# Altium PCB Relay Board.PcbDoc
Units mm, origin at the board's own origin, x right, y up, seen from the top; angles counter-clockwise.
Board outline 35 x 54 mm, 2 copper layers (Top Layer, Bottom Layer); 8 components, 9 nets, 28 pads, 0 vias.
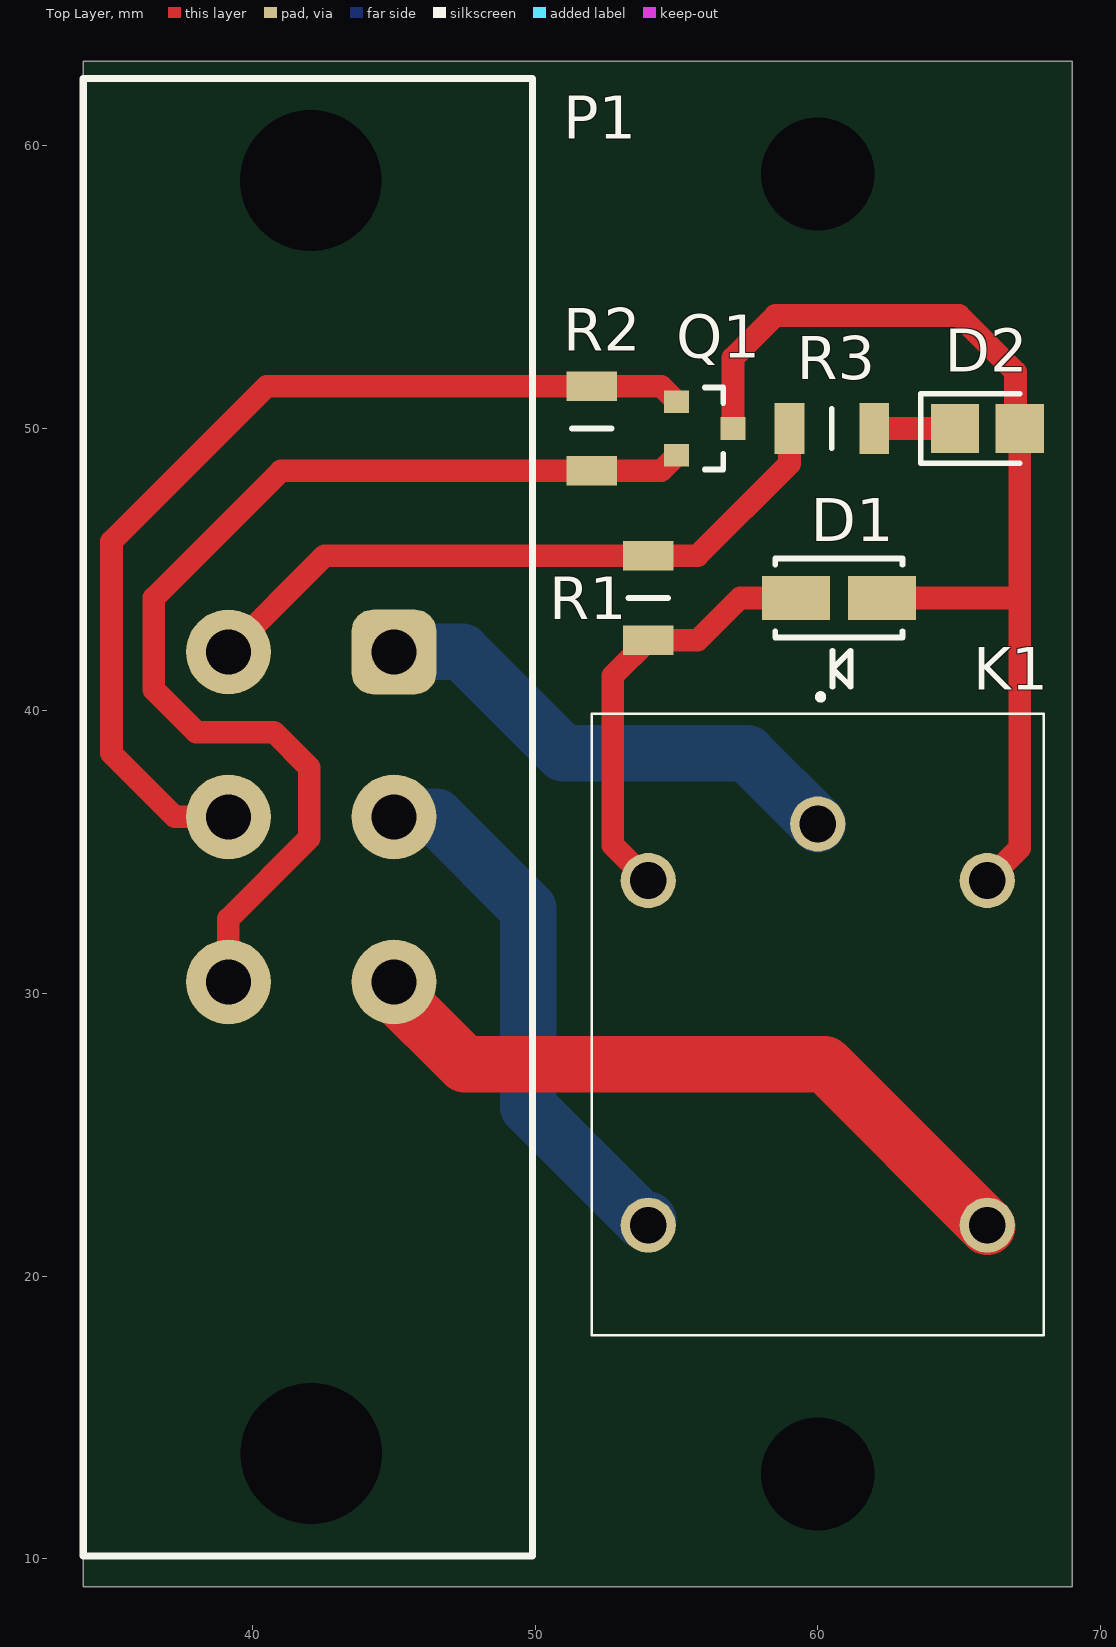
[diagram p0: Top Layer view]
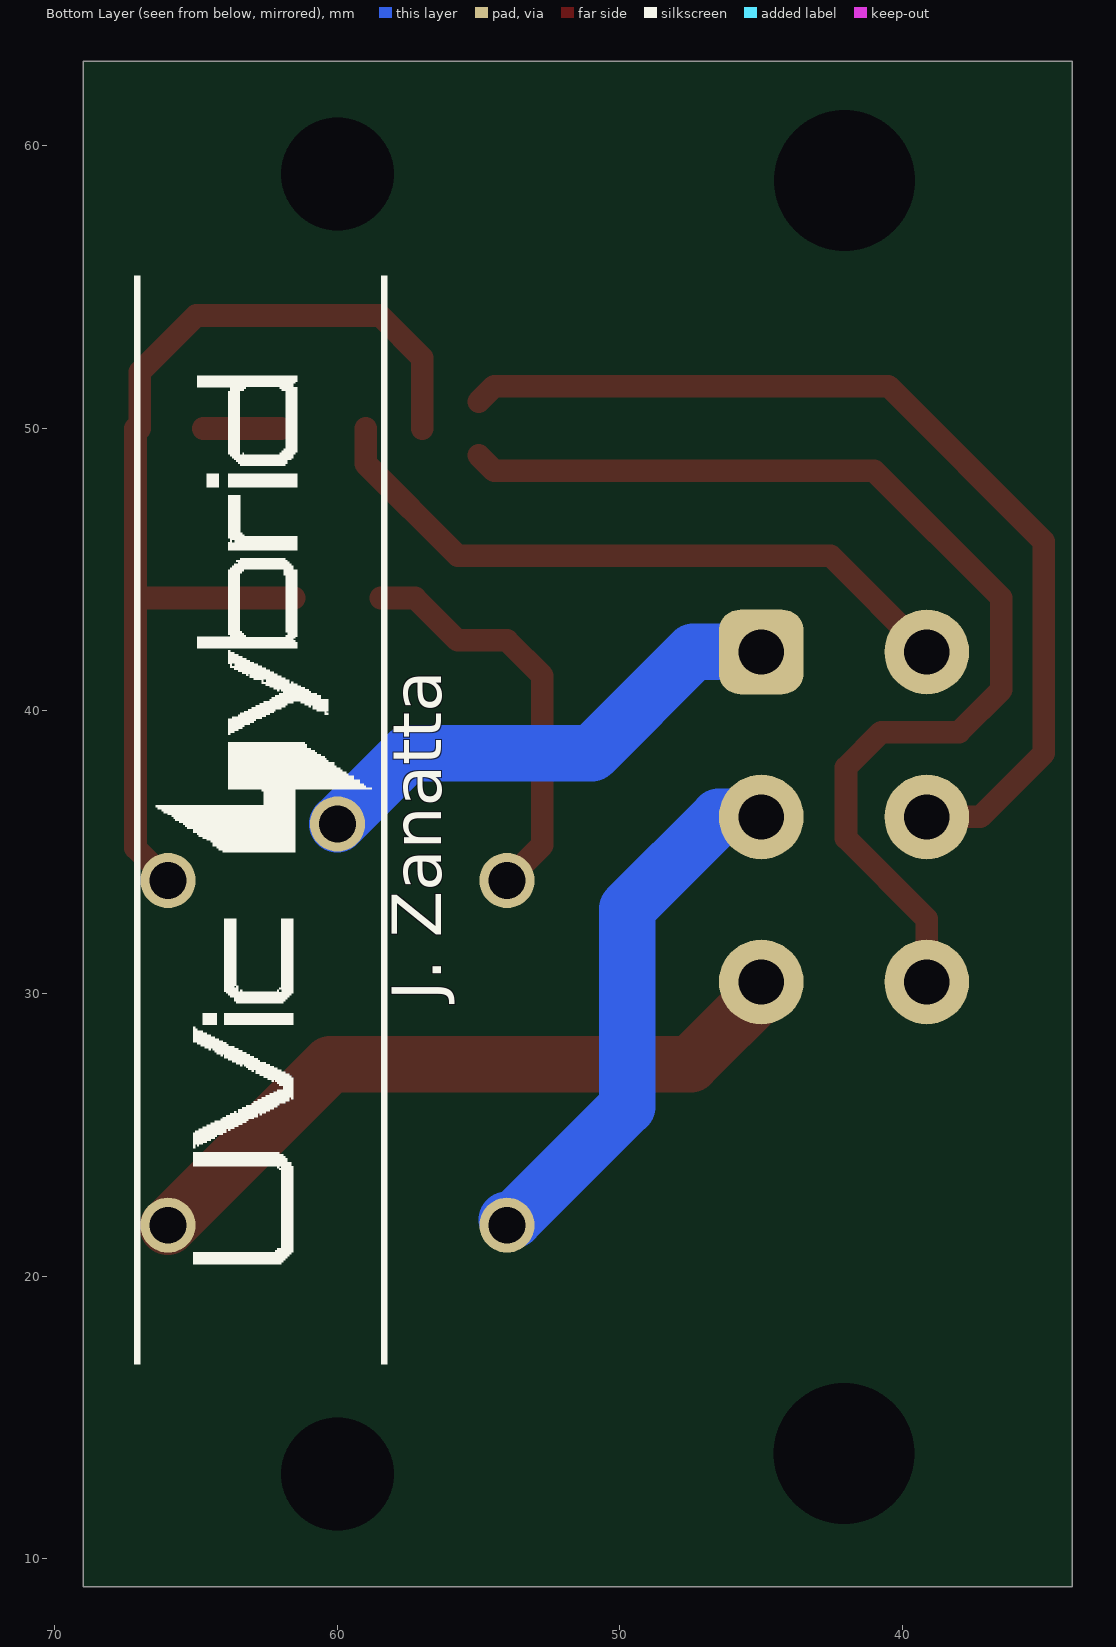
[diagram p1: Bottom Layer view, seen from below]
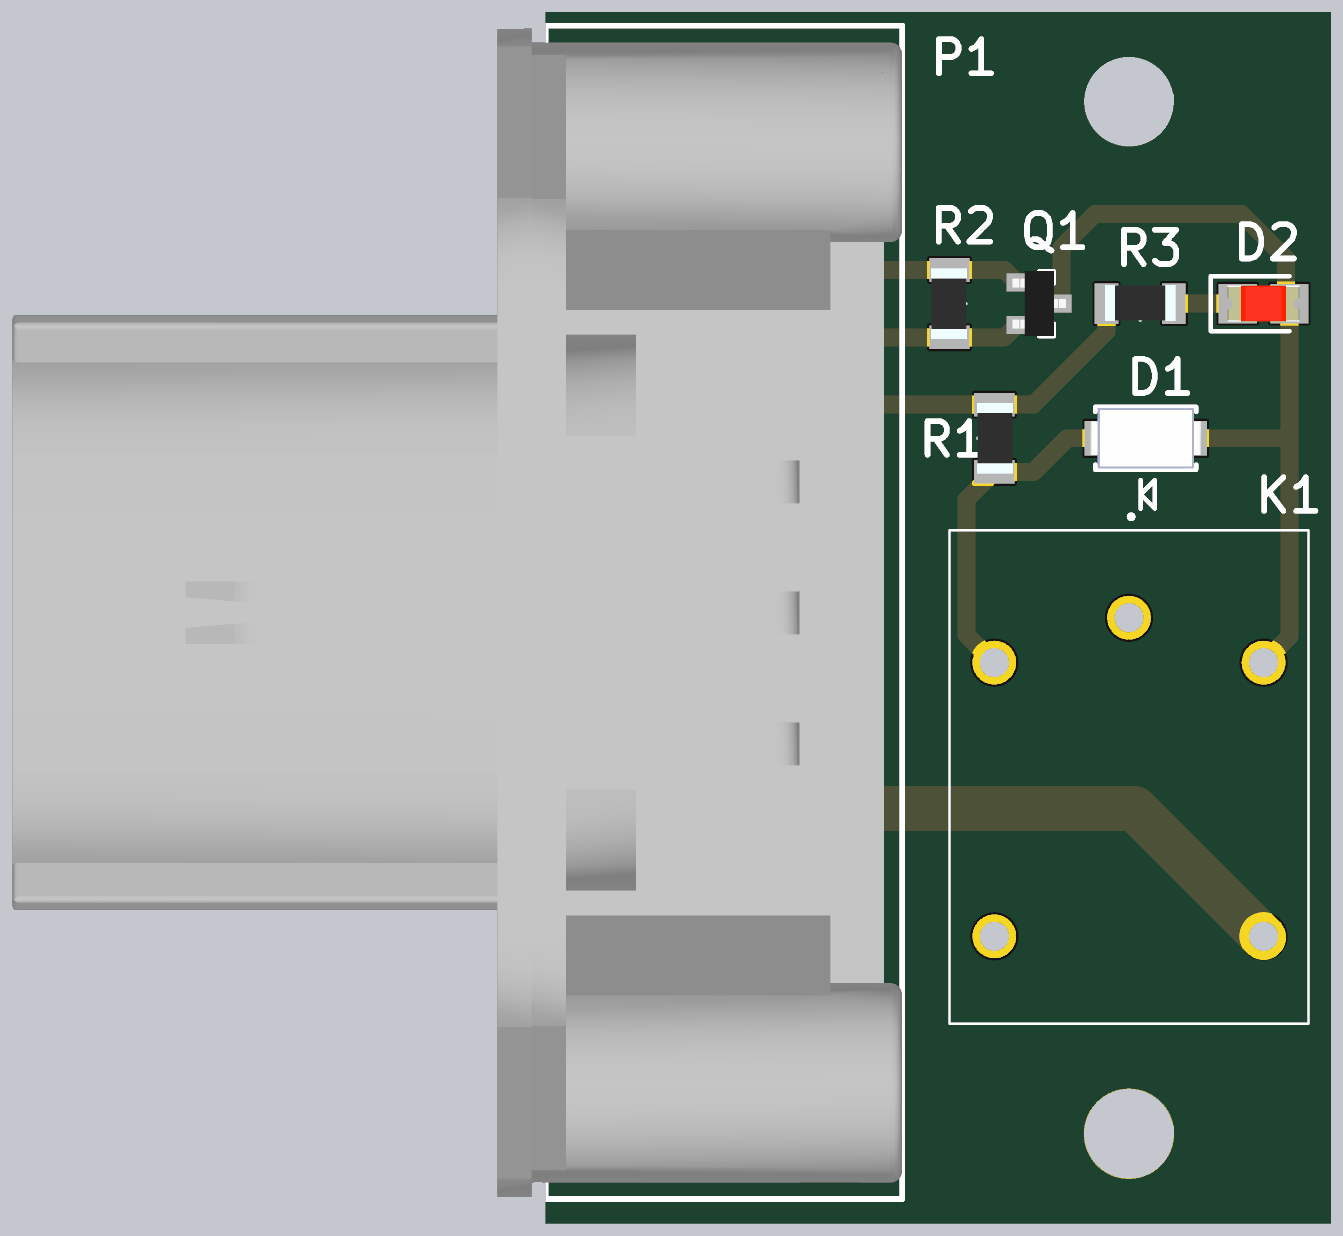
[diagram p2: 3D render of the assembled board from above, using the file's embedded part models]

## Layer stack, top to bottom
Top Solder: solder mask 0.0102, Solder Resist, Dk 3.5
Top Layer: signal copper 0.0356
Dielectric 1: dielectric 0.32, FR-4, Dk 4.8
Bottom Layer: signal copper 0.0356
Bottom Solder: solder mask 0.0102, Solder Resist, Dk 3.5

## Board outline
34,9 34,63 69,63 69,9

## Design rules (kind name [scope] priority, off if disabled: settings)
Clearance [All] p1: gap=0.254 ignorepadtopadclearanceinfootprint=FALSE except(0: Arc-Hole Track-Hole SMDPad-Hole THPad-Hole Via-Hole Fill-Hole Poly-Hole Region-Hole Text-Hole)
Height [All] p1: minheight=0.254 maxheight=50 prefheight=2
PolygonConnect [All] p1: connectstyle=Relief reliefconductorwidth=0.254 reliefentries=4 polygonreliefangle="90 Angle" airgapwidth=0.254
RoutingVias [All] p1: holewidth=0.711 width=1.27 viastyle="Through Hole" minholewidth=0.711 minwidth=1.27 maxholewidth=0.711 maxwidth=1.27
SolderMaskExpansion [All] p1: expansion=0.102
Width [All] p1: maxlimit=2 minlimit=0.4 preferedwidth=0.8
29 further rules are at their usual default settings.

## Components (designator, comment, footprint, x,y, rotation, side; value= is the part's Value field where it differs from the comment)
D1 "S1G-E3/61T" VISH-DO-214AC-SMA-2_N 60.75,44 r180 top
D2 "Red" LEDC3216X120NRED 66,50 r0 top
K1 "JSM1-12V-4" JSM112V4 60,34 r270 top
P1 "19427-0018" "MX150L 6pin" 49.9,10.09 r90 top
Q1 "Trans_Diodes_2N7002-7-F_eec" Diodes_2N7002-7-F_0 56,50 r0 top
R1 "120" RESC3216X60N 54,44 r90 top value=10K
R2 "10K" RESC3216X60N 52,50 r270 top
R3 "1k" RESC3216X60N 60.5,50 r180 top value=10K

## Footprints (in the part's own frame and the unit in brackets; to place one, negate y for a bottom-side part, rotate by r counter-clockwise, add the part's x,y. Pads: shape width x height; smd on the part's side, far side on the other; paste and mask are expansions set on the pad)
Diodes_2N7002-7-F_0 [mm]
  rect 0.9x0.8 smd paste+0 mask+0: 1(-1,0.95) 2(-1,-0.95) 3(1,0)
  silkscreen extent 0,-1.45 0.65,1.45, body extent -1.2,-1.45 1.2,1.45, height 1.1
JSM112V4 [mm]
  round 1.95 hole 1.3: 1(-2,0) 2(0,-6) 3(12.2,-6) 4(12.2,6) 5(0,6)
  silkscreen extent -6.6,-8 16.1,8
LEDC3216X120NRED [mm]
  rect 1.7x1.75 smd: 1(-1.15,0) 2(1.15,0)
  silkscreen extent -2.35,-1.22 1.15,1.22, body extent -1.6,-0.8 1.6,0.8, height 1.1
"MX150L 6pin" [mm] "19427-0018 MX150L 6pin"
  round 0 hole 5 unplated: 0(3.63,7.83) 0(48.69,7.85)
  rrect50% 3x3 hole 1.6: 1(32,4.9)
  round 3 hole 1.6: 2(26.16,4.9) 3(20.32,4.9) 4(32,10.76) 5(26.16,10.76) 6(20.32,10.76)
  silkscreen extent 0,0 52.3,15.9, body extent 0.1,0.01 52.18,39.66, height 33.7
RESC3216X60N [mm]
  rect 1.05x1.8 smd: 1(-1.5,0) 2(1.5,0)
  silkscreen extent 0,-0.7 0,0.7, body extent -1.57,-0.83 1.58,0.77, height 1.2
VISH-DO-214AC-SMA-2_N [mm] "Molded Diode, 2-Leads, Body 4.5x2.79mm, IPC Medium Density"
  rect 2.4x1.55 smd: 1(-1.525,0) 2(1.525,0)
  silkscreen extent -2.25,-1.4 2.25,3.14, body extent -2.5,-1.35 2.5,1.35, height 2.2

## Part data
D1: "Surface Mount Glass Passivated Rectifier, 400 VDC, 1 A, -55 to 150 degC, 2-Pin SMD, RoHS, Tape and Reel", Manufacturer="Vishay Semiconductor", Max Operating Temperature="150 degC", Min Operating Temperature="-55 degC", Package Quantity=1800, ComponentLink1Description="Manufacturer URL", ComponentLink1URL=http://www.vishay.com/, ComponentLink2Description=Datasheet, ComponentLink2URL=http://www.vishay.com/docs/88711/s1.pdf, DatasheetVersion=02/2016, Height="2.29 mm", Length="4.5 mm", Mount="Surface Mount", Mounting Technology="Surface Mount", PackageDescription="2-Pin Surface Mount Device, Body 4.245 x 2.665 mm", PackageReference=DO-214AC-2, Packaging="Tape and Reel", PartNumber=S1G-E3/61T, Pins=2, REACH SVHC=Unknown, RoHSCompliant=true
D2: library part LED2_2, "Typical RED, GREEN, YELLOW, AMBER GaAs LED", Case/Package=1206, Case Code (Metric)=3216, Colour=Yellow, Forward Current=20mA, Forward Voltage=2.1V, Lens Colour=White,Clear, Manufacturer="Broadcom Avago", Manufacturer Part Number=HSMY-C150, Max Operating Temperature=85°C, Max Power Dissipation=65mW, Min Operating Temperature=-40°C, Package Quantity=1, Reverse Voltage=5V, Supplier Part Number=732-4992-1-ND, Case Code (Imperial)=1206, ComponentLink1Description=https://datasheet.ciiva.com/15117/getdatasheetpartid-110528-15117488.pdf, ComponentLink1URL=https://datasheet.ciiva.com/15117/getdatasheetpartid-110528-15117488.pdf, ComponentLink2Description=https://datasheet.ciiva.com/11774/0900766b804a6539-11774578.pdf, ComponentLink2URL=https://datasheet.ciiva.com/11774/0900766b804a6539-11774578.pdf, ComponentLink3Description=https://datasheet.ciiva.com/19466/1557071-19466435.pdf, ComponentLink3URL=https://datasheet.ciiva.com/19466/1557071-19466435.pdf, ComponentLink4Description=https://datasheet.ciiva.com/14172/swseriehsmx-c150toc190-e-14172159.pdf, ComponentLink4URL=https://datasheet.ciiva.com/14172/swseriehsmx-c150toc190-e-14172159.pdf, ComponentLink5Description=https://datasheet.ciiva.com/29280/180507-da-01-en-chip-led-hsmy-c150-gelb-29280997.pdf, ComponentLink5URL=https://datasheet.ciiva.com/29280/180507-da-01-en-chip-led-hsmy-c150-gelb-29280997.pdf, ComponentLink6Description=https://datasheet.ciiva.com/11773/0900766b804a6539-11773956.pdf, ComponentLink6URL=https://datasheet.ciiva.com/11773/0900766b804a6539-11773956.pdf, ComponentLink7Description=https://datasheet.ciiva.com/15117/getdatasheetpartid-142358-15117749.pdf, ComponentLink7URL=https://datasheet.ciiva.com/15117/getdatasheetpartid-142358-15117749.pdf, ComponentLink8Description=https://datasheet.ciiva.com/46426/313031-46426533.pdf, ComponentLink8URL=https://datasheet.ciiva.com/46426/313031-46426533.pdf, ComponentLink9Description=https://datasheet.ciiva.com/14172/swseriehsmx-c150toc190-e-14172156.pdf, ComponentLink9URL=https://datasheet.ciiva.com/14172/swseriehsmx-c150toc190-e-14172156.pdf, ComponentLink10Description=https://datasheet.ciiva.com/29281/180509-da-01-en-chip-led-hsmh-c150-rot-29281009.pdf, ComponentLink10URL=https://datasheet.ciiva.com/29281/180509-da-01-en-chip-led-hsmh-c150-rot-29281009.pdf, Contact Plating=Gold, Depth=1.6mm, Dominant Wavelength=586nm, Height=1.1mm, Illumination Colour=Yellow, LatestRevisionDate=17-Jul-2002, LatestRevisionNote="Re-released for DXP Platform.", Lead Free="Lead Free", Length=3.2mm, Lens Style=Diffused,Colorless,Rectangular, Lens Transparency=Diffused, Luminous Intensity=8mcd, Mount="Surface Mount", Number of Elements=1, Number of LEDs=1, Number of Pins=2, PackageDescription="SM LED; 2 Flat Leads", PackageReference=3.2X1.6X1.1, PackageVersion=Feb-2002, Packaging="Tape and Reel", Power Dissipation=65mW, Power Rating=65mW, Published=8-Jun-2000, Publisher="Altium Limited", Radiation Hardening=No, REACH SVHC="No SVHC", Stock 1=0, Stock 2=0, Supplier 1=Digi-Key, Supplier 2=Digi-Key, Supplier 3=Digi-Key, Supplier 4=Digi-Key, Test Current=20mA, Viewing Angle=170°, Voltage Rating (DC)=2.1V, Wavelength=586nm, Width=1.6mm
K1: "PANASONIC ELECTRIC WORKS - JSM1-12V-4 - RELAY, AUTOMOTIVE, SPDT, 16VDC, 10A", Manufacturer_Name=Panasonic, Allied_Number=70618207, Allied Price/Stock=https://www.alliedelec.com/panasonic-jsm1-12v-4/70618207/, Arrow Part Number=JSM1-12V-4, Arrow Price/Stock=https://www.arrow.com/en/products/jsm1-12v-4/panasonic, Datasheet Link=https://media.digikey.com/pdf/Data%20Sheets/Panasonic%20Electric%20Works%20PDFs/JS-M_Series_Rev_Dec_2011.pdf, Manufacturer_Part_Number=JSM1-12V-4
P1: library part "19427-0018 MX150L 6pin", "MX150L 6pin", Manufacturer_Name=Molex, Supplier Part Number 1=WM17506-ND, Manufacturer_Part_Number=19427-0018
Q1: "TRANS MOSFET N-CH 60V 115MA SOT23-3", breakdown_voltage_drain_to_source="70 V", current_rating="115 mA", Digikey Part Number=2N7002-FDICT-ND, Manufacturer=Diodes, max_breakdown_voltage_gate_to_source="20 V", min_breakdown_voltage_gate_to_source="-20 V", Mouser Part Number=621-2N7002-F, Octopart Part Number=e39a2a95da213c5d, Package=SOT-23, Part Number=2N7002-7-F, power_dissipation="300 mW", rds_drain_to_source_resistance_on="4.4 O", Temperature="-55°C to +150°C", Temperature Range High=+150°C, Temperature Range Low=-55°C, vds_drain_to_source_voltage="60 V", Category 2F8Ae2801E7Ef44D=Uncategorized, Category 3B27F62D0A3Ae0E0="Discretes (diodes, transistors, thyristors ...)", Category 6F04A20E5Eeab4C3=Uncategorized, Category 9E07530Daf1645C0="Semiconductors and Actives", Category 931F5E15A77D48D8=Uncategorized, Category Aa6D67679B8D71Aa="N Channel MOSFET", Category D77D1A77E69F0Cba=Transistors, Category E7B12Abbd6523C76=MOSFETs, ComponentLink1Description=Upverter, ComponentLink1URL=https://upverter.com/upn/revision/25d808f54d4a1cce/, ComponentLink2Description=Datasheet, ComponentLink2URL=https://upverter.com/datasheet/64901800f65d029d74a1b11cf5c344e3d7ff58ae.pdf, Digikey Description="TRANS MOSFET N-CH 60V 115MA SOT23-3", helpURL=https://upverter.com/upn/revision/25d808f54d4a1cce/, id_continuous_drain_current="115 mA", Ipc Land Pattern Name=SOT92P240X120-3, Lead Free=yes, Mounting Type="surface mount", Num Pins=3, polarity=N-Channel, Price=0.0714567392161, RoHS=TRUE, Supplier 1=Digi-Key, Supplier 2=Mouser, Supplier Part Number 1=2N7002-FDICT-ND, Supplier Part Number 2=621-2N7002-F, voltage_rating_dc="60 V"
R1 R2: library part Res1, "Resistor", Case/Package=1206, Case Code (Metric)=3216, Manufacturer="Stackpole Electronics", Manufacturer Part Number=RNCP1206FTD1K00, Max Operating Temperature=155°C, Max Power Dissipation=500mW, Min Operating Temperature=-55°C, Resistance=120R, Supplier Part Number=RNCP1206FTD10K0CT-ND, Temperature Coefficient=100ppm/°C, Tolerance=1%, Case Code (Imperial)=1206, ComponentLink1Description=http://www.seielect.com/Catalog/SEI-rncp.pdf, ComponentLink1URL=http://www.seielect.com/Catalog/SEI-rncp.pdf, ComponentLink2Description=https://www.seielect.com/catalog/SEI-Packaging.pdf, ComponentLink2URL=https://www.seielect.com/catalog/SEI-Packaging.pdf, Composition="Thin Film", Contact Plating=Nickel,Tin,Matte, Height=0.024inch, Lead Free="Lead Free", Length=0.122inch, Mount="Surface Mount", Number of Terminations=2, Packaging="Tape and Reel", Pricing 1="1=0.1, 10=0.052, 100=0.0211, 1000=0.00949, 2500=0.00824 (USD)", Radiation Hardening=No, Stock 1=679, Supplier 1=Digi-Key, Width=0.059inch
R3: library part Res1, "Resistor", Case/Package=1206, Case Code (Metric)=3216, Manufacturer="Stackpole Electronics", Manufacturer Part Number=RNCP1206FTD1K00, Max Operating Temperature=155°C, Max Power Dissipation=500mW, Min Operating Temperature=-55°C, Resistance=10kR, Supplier Part Number=RNCP1206FTD10K0CT-ND, Temperature Coefficient=100ppm/°C, Tolerance=1%, Case Code (Imperial)=1206, ComponentLink1Description=http://www.seielect.com/Catalog/SEI-rncp.pdf, ComponentLink1URL=http://www.seielect.com/Catalog/SEI-rncp.pdf, ComponentLink2Description=https://www.seielect.com/catalog/SEI-Packaging.pdf, ComponentLink2URL=https://www.seielect.com/catalog/SEI-Packaging.pdf, Composition="Thin Film", Contact Plating=Nickel,Tin,Matte, Height=0.024inch, Lead Free="Lead Free", Length=0.122inch, Mount="Surface Mount", Number of Terminations=2, Packaging="Tape and Reel", Pricing 1="1=0.1, 10=0.052, 100=0.0211, 1000=0.00949, 2500=0.00824 (USD)", Radiation Hardening=No, Stock 1=679, Supplier 1=Digi-Key, Width=0.059inch

## Free pads (board coordinates)
  round 1.524 hole 4: 0(60,13)
  round 1.524 hole 4 unplated: 0(60,59)

## Nets (pads, with @x,y where several pads share a name; then routed paths per layer and width w, separated by ;. In a path a pad name is that pad's centre, name@x,y a point inside that pad or via, vN(x,y) a via of type N, cw(c..) or ccw(c..) an arc to the next point about the centre after c; other vN are vias at no path point)
12V: P1.4 R1.2 R3.2 | length 23.9
  Top Layer w0.8: P1.4 42.55,45.5 R1.2 55.75,45.5 59,48.75 R3.2
Common: K1.1 P1.1 | length 17.5
  Bottom Layer w2: P1.1 47.41,42.09 51,38.5 57.5,38.5 K1.1
GND: P1.6 Q1.2 R2.2 | length 39.3
  Top Layer w0.8: P1.6 39.14,32.64 42,35.5 42,38 40.75,39.25 38,39.25 36.5,40.75 36.5,44 41,48.5 R2.2 54.45,48.5 Q1.2
NC: K1.4 P1.3 | length 24.7
  Top Layer w2: P1.3@44.795,30.205 47.5,27.5 60.25,27.5 K1.4@66,21.75
NetD1_1: D1.1 D2.2 K1.5 Q1.3 | length 37.9
  Top Layer w0.8: Q1.3 57,52.5 58.5,54 65,54 67,52 D2.2@67,50 ; D1.1@61.525,44 67,44 ; K1.5 67.15,35.15 D2.2
NetD1_2: D1.2 K1.2 R1.1 | length 14.6
  Top Layer w0.8: K1.2 52.75,35.25 52.75,41.25 R1.1 55.75,42.5 57.25,44 D1.2@58.475,44
NetD2_1: D2.1 R3.1 | length 2.8
  Top Layer w0.8: R3.1 D2.1@64.75,50
NetP1_5: P1.5 Q1.1 R2.1 | length 35.1
  Top Layer w0.8: P1.5 37.25,36.25 35,38.5 35,46 40.5,51.5 R2.1 54.45,51.5 Q1.1
NO: K1.3 P1.2 | length 19
  Bottom Layer w2: P1.2 46.5,36.25 49.75,33 49.75,26 53.75,22 K1.3@54,22
pads on no net: P1.0

## Silkscreen, mask and mechanical layers (free items; w line width, h text height)
Bottom Overlay:
  drawing of 14 lines, arcs and shapes, not listed
  text "J. Zanatta" at 55.75,29.75 h3 r270
Mechanical 1:
  the board outline again, w0.254